# EAGLE board minimum system (EAGLE 7.6.0)
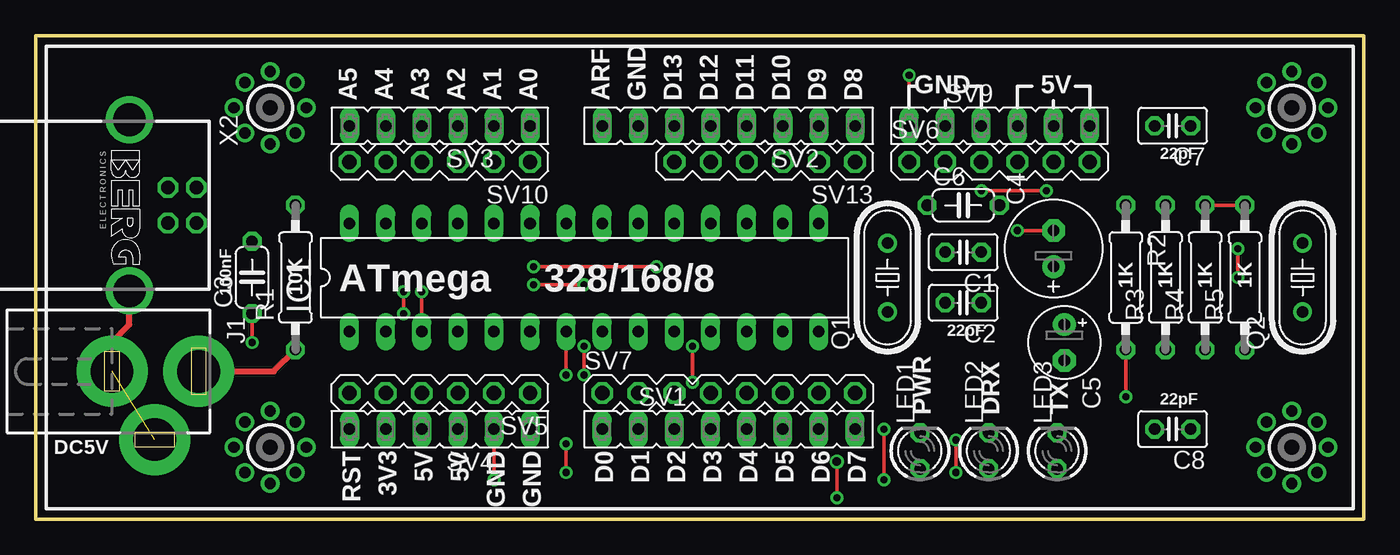
[diagram p0: board, top side]
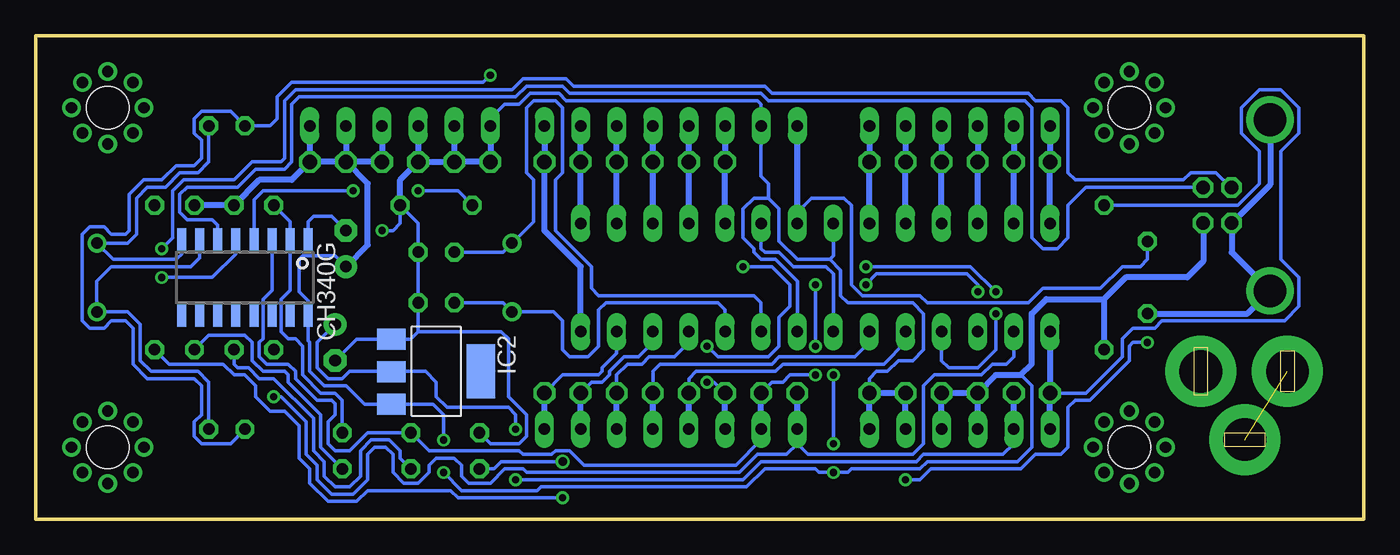
[diagram p1: board, bottom side, seen from below]

Size 93.47 x 34.04 mm. Coordinates in mm from the lower left corner, seen from the top.
Outline: 0,34.04 93.47,34.04 93.47,0 0,0 0,34.04
Copper layers (1*16): Top 0.035mm / dielectric 1.5mm / Bottom 0.035mm
Design rules "default": minimum track width 10mil, minimum drill 24mil, track to track 8mil, track to pad 8mil, pad to pad 8mil, via to via 8mil, smd to smd 8mil, copper to edge 40mil, drill to drill 8mil, minimum pad ring 10mil, minimum via ring 8mil, stop-mask expansion 4mil, vias tented up to drill 0mil, thermal gap 10mil

## Footprints (pad centres in the part's own frame; a part is rotated, then mirrored left to right if it is on the bottom)
C025-025X050 = drill 0.813 octagon: 1 -1.27,0; 2 1.27,0
C050-024X044 = drill 0.813 octagon: 1 -2.54,0; 2 2.54,0
E2,5-7 = drill 0.813 pad 1.6: + -1.27,0 | drill 0.813 pad 1.6 octagon: - 1.27,0
E2,5-5 = drill 0.813 pad 1.6: + -1.27,0 | drill 0.813 pad 1.6 octagon: - 1.27,0
3,0 = drill 0.8: P$1 -2.54,0; P$2 2.54,0; P$3 0,2.54; P$4 0,-2.54; P$5 1.778,1.778; P$6 1.778,-1.778; P$7 -1.778,1.778; P$8 -1.778,-1.778 | hole 3: 0,0
DIL28-3 = drill 0.813 long: 1 -16.51,-3.81; 2 -13.97,-3.81; 3 -11.43,-3.81; 4 -8.89,-3.81; 5 -6.35,-3.81; 6 -3.81,-3.81; 7 -1.27,-3.81; 8 1.27,-3.81; 9 3.81,-3.81; 10 6.35,-3.81; 11 8.89,-3.81; 12 11.43,-3.81; 13 13.97,-3.81; 14 16.51,-3.81; 15 16.51,3.81; 16 13.97,3.81; 17 11.43,3.81; 18 8.89,3.81; 19 6.35,3.81; 20 3.81,3.81; 21 1.27,3.81; 22 -1.27,3.81; 23 -3.81,3.81; 24 -6.35,3.81; 25 -8.89,3.81; 26 -11.43,3.81; 27 -13.97,3.81; 28 -16.51,3.81
SOT223 = smd 1.499 x 2.007: 1 -2.261,-3.15; 2 0.025,-3.15; 3 2.311,-3.15 | smd 3.81 x 2.007: 4 0,3.15
DCJ0202 = drill 3 pad 5: 1 0,3.1; 2 4.8,0; 3 0,-3
LED3MM = drill 0.813 octagon: A -1.27,0; K 1.27,0
HC49/S = drill 0.813: 1 -2.413,0; 2 2.413,0
0207/10 = drill 0.813 octagon: 1 -5.08,0; 2 5.08,0
FE08 = drill 0.813 long: 1 -8.89,0; 2 -6.35,0; 3 -3.81,0; 4 -1.27,0; 5 1.27,0; 6 3.81,0; 7 6.35,0; 8 8.89,0
FE06 = drill 0.813 long: 1 -6.35,0; 2 -3.81,0; 3 -1.27,0; 4 1.27,0; 5 3.81,0; 6 6.35,0
MA06-1 = drill 1.016 octagon: 1 -6.35,0; 2 -3.81,0; 3 -1.27,0; 4 1.27,0; 5 3.81,0; 6 6.35,0
MA08-1 = drill 1.016 octagon: 1 -8.89,0; 2 -6.35,0; 3 -3.81,0; 4 -1.27,0; 5 1.27,0; 6 3.81,0; 7 6.35,0; 8 8.89,0
SOIC16 = smd 0.635 x 1.524: 1 -4.445,-2.695; 2 -3.175,-2.695; 3 -1.905,-2.695; 4 -0.635,-2.695; 5 0.635,-2.695; 6 1.905,-2.695; 7 3.175,-2.695; 8 4.445,-2.695; 9 4.445,2.695; 10 3.175,2.695; 11 1.905,2.695; 12 0.635,2.695; 13 -0.635,2.695; 14 -1.905,2.695; 15 -3.175,2.695; 16 -4.445,2.695
PN61729-S = drill 0.95 octagon: 1 1.25,4.71; 2 -1.25,4.71; 3 -1.25,2.71; 4 1.25,2.71 | drill 2.3 pad 2.9: S1 -6.02,0; S2 6.02,0

## Placement (x,y rotation side)
C1  [C025-025X050]  65.28,18.8 180 top
C2  [C025-025X050]  65.28,15.24 180 top
C3  [C050-024X044]  15.24,17.02 90 top
C4  [E2,5-7]  71.63,19.05 90 top
C5  [E2,5-5]  72.39,12.45 270 top
C6  [C050-024X044]  65.28,22.1 0 top
C7  [C025-025X050]  80.01,27.69 180 top
C8  [C025-025X050]  80.01,6.35 180 top
H1  MOUNT-HOLE3.0  [3,0]  16.51,28.96 0 top
H2  MOUNT-HOLE3.0  [3,0]  16.51,5.08 0 top
H3  MOUNT-HOLE3.0  [3,0]  88.39,28.96 0 top
H4  MOUNT-HOLE3.0  [3,0]  88.39,5.08 0 top
IC1  MEGA8-P  [DIL28-3]  38.61,17.02 0 top
IC2  REG1117  [SOT223]  65.28,10.41 270 bottom
J1  DCJ0202  [DCJ0202]  8.38,10.41 270 top
LED1  [LED3MM]  62.23,4.83 90 top
LED2  [LED3MM]  67.06,4.83 90 top
LED3  [LED3MM]  71.88,4.83 90 top
Q1  [HC49/S]  59.94,17.02 90 top
Q2  [HC49/S]  89.15,17.02 90 top
R1  10k  [0207/10]  18.29,17.02 90 top
R2  1k  [0207/10]  76.71,17.02 270 top
R3  1k  [0207/10]  79.5,17.02 90 top
R4  1k  [0207/10]  82.3,17.02 90 top
R5  1k  [0207/10]  85.09,17.02 90 top
SV1  [FE08]  48.77,6.35 0 top
SV2  [FE08]  48.77,27.69 180 top
SV3  [FE06]  28.45,27.69 180 top
SV4  [FE06]  28.45,6.35 180 top
SV5  [MA06-1]  28.45,8.89 180 top
SV6  [MA06-1]  67.82,25.15 0 top
SV7  [MA08-1]  48.77,8.89 0 top
SV9  [FE06]  67.82,27.69 0 top
SV10  [MA06-1]  28.45,25.15 180 top
SV13  [MA06-1]  51.31,25.15 180 top
U$1  CH340G  [SOIC16]  78.74,17.02 180 bottom
X2  PN61729-S  [PN61729-S]  6.6,22.1 270 top

## Library data of the parts
C1-C8 = rcl
H1-H4 = holes
IC1 = atmel; OC_FARNELL: unknown; OC_NEWARK: unknown
IC2 = burr-brown; MPN: REG1117; OC_FARNELL: 1097566; OC_NEWARK: 14P6981
J1 = con-jack; OC_FARNELL: unknown; OC_NEWARK: unknown
LED1-LED3 = led
Q1 Q2 = crystal; OC_FARNELL: 1667008; OC_NEWARK: unknown
R1-R5 = resistor
SV1-SV4 SV9 = con-lsta; OC_FARNELL: unknown; OC_NEWARK: unknown
SV5-SV7 SV10 SV13 = con-lstb; OC_FARNELL: unknown; OC_NEWARK: unknown
U$1 = ch340g
X2 = con-berg; OC_FARNELL: unknown; OC_NEWARK: unknown

## Nets
2: IC1.4 SV1.3 SV7.3
3: IC1.5 SV1.4 SV7.4
3V3: C5.+ IC2.2 SV4.5 SV5.5
4: IC1.6 SV1.5 SV7.5
5: IC1.11 SV1.6 SV7.6
6: IC1.12 SV1.7 SV7.7
7: IC1.13 SV1.8 SV7.8
8: IC1.14 SV2.1 SV13.1
9: IC1.15 SV2.2 SV13.2
10: IC1.16 SV2.3 SV13.3
11: IC1.17 SV2.4 SV13.4
12: IC1.18 SV2.5 SV13.5
13: IC1.19 SV2.6 SV13.6
A0: IC1.23 SV3.1 SV10.1
A1: IC1.24 SV3.2 SV10.2
A2: IC1.25 SV3.3 SV10.3
A3: IC1.26 SV3.4 SV10.4
A4: IC1.27 SV3.5 SV10.5
A5: IC1.28 SV3.6 SV10.6
AREF: C3.2 IC1.21 SV2.8
D0: IC1.2 R2.2 SV1.1 SV7.1
D1: IC1.3 LED2.K SV1.2 SV7.2 U$1.3
GND: C1.1 C2.1 C3.1 C4.- C5.- C6.2 C7.2 C8.2 IC1.8 IC1.22 IC2.1 J1.2 J1.3 LED1.K SV2.7 SV4.1 SV4.2 SV5.1 SV5.2 SV6.1 SV6.2 SV6.3 SV9.1 SV9.2 SV9.3 U$1.1 X2.4 X2.S1 X2.S2
N$2: U$1.6 X2.2
N$3: U$1.5 X2.3
N$4: C1.2 IC1.9 Q1.2
N$5: C2.2 IC1.10 Q1.1
N$6: C6.1 U$1.4
N$7: LED2.A R3.1
N$8: LED3.A R4.1
N$9: LED1.A R5.1
N$10: C7.1 Q2.2 U$1.8
N$11: C8.1 Q2.1 U$1.7
RESET: IC1.1 R1.2 SV4.6 SV5.6
TX: LED3.K R2.1 U$1.2
VCC: C4.+ IC1.7 IC1.20 IC2.3 J1.1 R1.1 R3.2 R4.2 R5.2 SV4.3 SV4.4 SV5.3 SV5.4 SV6.4 SV6.5 SV6.6 SV9.4 SV9.5 SV9.6 U$1.16 X2.1

## Tracks (layer width: path | path; a pad name or v marks a point on that pad's centre or on a via)
2  (via drill 0.5)
  Top 0.254: v25.91,14.48 v25.91,16 | v35.05,17.78 v43.69,17.78 | v46.23,12.19 v46.23,9.65
  Bottom 0.254: IC1.4 29.72,11.18 29.21,10.67 27.18,10.67 25.91,11.94 v25.91,14.48 | v25.91,16 27.69,17.78 v35.05,17.78 | v46.23,12.19 45.47,11.43 41.91,11.43 41.15,12.19 41.15,14.22 40.39,14.99 40.39,16.51 41.66,17.78 v43.69,17.78 | v46.23,9.65 45.72,9.65 SV7.3
  Bottom 0.406: SV1.3 SV7.3
3
  Bottom 0.254: IC1.5 32.26,12.45 33.78,10.92 40.89,10.92 41.4,10.41 46.99,10.41 47.5,9.91 SV7.4
  Bottom 0.406: SV1.4 SV7.4
3V3  (via drill 0.5)
  Top 0.254: v59.69,2.79 v59.69,6.35
  Bottom 0.254: C5.+ 73.66,12.45 73.66,10.67 72.9,9.91 71.88,9.91 71.37,10.41 68.45,10.41 IC2.2 68.4,10.41 66.04,10.41 65.28,9.65 65.28,8.64 64.52,7.87 60.2,7.87 59.69,7.37 v59.69,6.35 | SV5.5 24.64,5.33 25.4,4.57 30.99,4.57 31.5,4.06 42.42,4.06 43.69,2.79 v59.69,2.79
  Bottom 0.406: SV4.5 SV5.5
4
  Bottom 0.254: SV7.5 50.04,10.41 49.53,10.92 41.66,10.92 41.15,11.43 35.81,11.43 34.8,12.45 IC1.6
  Bottom 0.406: SV1.5 SV7.5
5
  Bottom 0.254: IC1.11 47.5,12.45 48.51,11.43 50.29,11.43 50.8,10.92 51.82,10.92 52.58,10.16 SV7.6
  Bottom 0.406: SV1.6 SV7.6
6
  Bottom 0.254: IC1.12 50.04,12.45 51.05,11.43 52.07,11.43 53.09,10.41 53.09,10.16 53.59,9.65 54.36,9.65 SV7.7
  Bottom 0.406: SV1.7 SV7.7
7
  Bottom 0.254: IC1.13 52.58,11.68 53.59,10.67 53.59,10.41 53.85,10.16 56.39,10.16 SV7.8
  Bottom 0.406: SV1.8 SV7.8
8
  Bottom 0.406: IC1.14 55.12,17.78 57.66,20.32 SV13.1 SV2.1
9
  Bottom 0.406: IC1.15 SV13.2 SV2.2
10
  Bottom 0.406: IC1.16 SV13.3 SV2.3
11
  Bottom 0.406: IC1.17 SV13.4 SV2.4
12
  Bottom 0.406: IC1.18 SV13.5 SV2.5
13
  Bottom 0.406: IC1.19 SV13.6 SV2.6
A0
  Bottom 0.406: IC1.23 SV10.1 SV3.1
A1
  Bottom 0.406: IC1.24 SV10.2 SV3.2
A2
  Bottom 0.406: IC1.25 SV10.3 SV3.3
A3
  Bottom 0.406: IC1.26 SV10.4 SV3.4
A4
  Bottom 0.406: IC1.27 24.64,24.64 SV10.5 SV3.5
A5
  Bottom 0.406: IC1.28 SV10.6 SV3.6
AREF
  Bottom 0.254: C3.2 15.24,18.29 15.75,17.78 17.02,17.78 18.54,16.26 22.61,16.26 23.62,15.24 30.73,15.24 31.24,15.75 35.31,15.75 36.07,16.51 36.07,22.1 36.58,22.61 38.86,22.61 39.88,21.59
  Bottom 0.406: IC1.21 39.88,21.59 SV2.8
D0  (via drill 0.5)
  Top 0.254: v76.71,8.64 R2.2
  Bottom 0.254: IC1.2 24.64,11.43 25.15,10.92 26.16,10.92 26.92,10.16 30.23,10.16 30.99,9.4 30.99,5.33 31.75,4.57 39.12,4.57 39.88,5.33 | 39.88,5.33 SV1.1 | 39.88,5.33 40.64,4.57 42.67,4.57 43.94,3.3 58.93,3.3 59.18,3.56 60.45,3.56 61.47,2.54 62.99,2.54 63.5,3.05 63.5,3.81 64.01,4.32 65.28,4.32 65.79,3.81 65.79,3.3 66.55,2.54 67.56,2.54 68.33,3.3 68.33,4.57 68.83,5.08 69.6,5.08 70.1,4.57 70.1,2.79 71.12,1.78 72.64,1.78 73.66,2.79 73.66,3.81 74.42,4.57 74.42,6.86 76.2,8.64 v76.71,8.64
  Bottom 0.406: SV1.1 SV7.1
D1  (via drill 0.5)
  Top 0.254: IC1.3 v27.18,16 | v35.05,16.51 v38.61,16.51 | v38.61,12.19 v38.61,10.16
  Bottom 0.254: U$1.3 76.83,16.13 77.47,15.49 77.47,12.7 77.72,12.45 77.72,11.43 77.22,10.92 75.69,10.92 75.18,10.41 75.18,9.91 73.66,8.38 72.64,8.38 72.39,8.13 72.39,7.37 72.9,6.86 72.9,5.33 72.39,4.83 71.37,4.83 70.1,6.1 LED2.K 65.79,4.83 59.44,4.83 59.18,4.57 57.15,4.57 56.9,4.83 55.88,4.83 54.86,3.81 44.2,3.81 42.42,5.59 SV1.2 | v27.18,16 27.18,16.51 27.94,17.27 34.29,17.27 v35.05,16.51 | v38.61,16.51 v38.61,12.19 | v38.61,10.16 40.39,10.16 40.89,9.65 41.66,9.65 SV7.2
  Bottom 0.406: SV1.2 SV7.2
GND  (via drill 0.5)  (1 unrouted)
  Top 0.254: v69.09,20.32 C4.- | C3.1 v15.24,12.45 | v32.26,2.79 SV4.2 | v61.47,31.24 SV9.1
  Top 0.406: J1.3 5.38,12.49 6.6,13.72 X2.S2
  Bottom 0.254: IC1.8 39.88,16.76 41.4,18.29 42.42,18.29 42.93,18.8 42.93,19.05 43.69,19.81 43.69,21.84 42.93,22.61 41.91,22.61 | 41.91,22.61 41.15,21.84 41.15,19.56 39.88,18.29 37.59,18.29 | SV5.1 34.8,9.91 34.29,10.41 33.53,10.41 32.77,11.18 31.75,11.18 30.99,11.94 30.99,14.48 31.75,15.24 36.32,15.24 36.83,15.75 36.83,17.53 37.59,18.29 | U$1.1 74.29,20.96 73.91,21.34 72.64,21.34 C4.- | 66.55,13.21 67.08,12.68 IC2.1 70.89,12.68 C5.- | 66.55,13.21 C2.1 C1.1 66.55,20.83 C6.2 67.82,20.83 68.33,20.32 v69.09,20.32 | IC1.22 37.34,18.54 37.59,18.29 | 41.91,22.61 41.91,23.62 42.42,24.13 SV2.7 42.42,29.21 42.67,29.46 56.13,29.46 56.64,29.97 58.67,29.97 59.44,29.21 60.45,29.21 61.47,28.19 SV6.1 | v15.24,12.45 16.26,12.45 16.51,12.19 16.51,11.18 19.3,8.38 20.32,8.38 20.83,7.87 20.83,5.08 21.34,4.57 23.11,4.57 24.13,3.56 30.48,3.56 31.24,2.79 v32.26,2.79 | LED1.K 61.47,5.33 59.44,5.33 58.93,5.84 58.93,7.37 60.2,8.64 60.2,12.7 60.71,13.21 66.55,13.21 | v61.47,31.24 61.98,30.73 75.44,30.73 76.45,29.72 76.45,28.19 76.96,27.69 C7.2 79.76,28.7 81.79,28.7 82.3,28.19 82.3,27.18 81.79,26.67 81.79,25.4 82.3,24.89 83.57,24.89 84.58,23.88 85.85,23.88 86.87,22.86 86.87,20.32 87.12,20.07 88.14,20.07 88.65,20.57 89.66,20.57 90.17,20.07 90.17,13.97 89.66,13.46 88.65,13.46 88.14,13.97 87.12,13.97 86.61,13.46 86.61,10.92 85.6,9.91 82.3,9.91 81.79,9.4 81.79,7.37 82.3,6.86 82.3,5.84 81.79,5.33 79.76,5.33 C8.2
  Bottom 0.406: SV4.2 SV5.2 SV5.1 SV4.1 | SV9.1 SV6.1 SV6.2 | SV9.2 SV6.2 | SV9.3 SV6.3 | SV6.3 SV6.2 | C6.2 67.82,23.88 SV6.3 | X2.S1 6.6,23.56 X2.4 9.31,18.79 X2.S2 8.2,14.48 C3.1
N$2
  Bottom 0.254: X2.2 19.58,23.35 20.83,22.1 20.83,19.81 21.59,19.05 22.61,19.05 23.37,19.81 23.37,28.96 23.88,29.46 41.91,29.46 42.42,29.97 55.88,29.97 56.39,30.48 58.93,30.48 59.69,29.72 74.93,29.72 75.44,29.21 75.44,25.15 75.95,24.64 77.98,24.64 79.25,23.37 82.8,23.37 83.31,22.86 83.31,21.59 82.8,21.08 81.03,21.08 80.64,20.7 U$1.6
N$3  (via drill 0.5)
  Top 0.254: v84.58,19.05 v84.58,17.02
  Bottom 0.254: X2.3 9.38,23.35 10.41,24.38 12.19,24.38 12.7,23.88 20.32,23.88 20.83,24.38 20.83,28.96 21.34,29.46 23.11,29.46 23.62,29.97 41.66,29.97 42.16,30.48 55.63,30.48 56.13,30.99 59.18,30.99 59.94,30.23 75.18,30.23 75.95,29.46 75.95,25.4 76.2,25.15 78.23,25.15 79.5,23.88 83.06,23.88 83.82,23.11 83.82,19.81 v84.58,19.05 | U$1.5 79.38,18.67 81.03,17.02 v84.58,17.02
N$4
  Bottom 0.254: IC1.9 42.42,15.24 42.93,15.75 53.85,15.75 54.36,16.26 54.36,17.78 56.9,20.32 56.9,23.88 56.39,24.38 56.39,28.96 56.9,29.46 58.42,29.46 58.93,28.96 58.93,24.38 58.42,23.88 58.42,20.96 59.5,19.88 Q1.2 60.58,18.8 C1.2
N$5
  Bottom 0.254: IC1.10 44.96,14.73 45.47,15.24 53.34,15.24 53.85,14.73 53.85,12.19 54.61,11.43 55.88,11.43 56.39,11.94 56.39,13.97 57.02,14.61 Q1.1 60.58,15.24 C2.2
N$6  (via drill 0.5)
  Top 0.254: v71.12,23.11 v66.55,23.11
  Bottom 0.254: U$1.4 78.1,22.48 77.47,23.11 v71.12,23.11 | v66.55,23.11 63.75,23.11 C6.1
N$7
  Bottom 0.254: R3.1 79.5,10.92 79.25,10.67 78.49,10.67 77.72,9.91 76.71,9.91 73.91,7.11 73.91,4.83 73.15,4.06 73.15,3.05 72.39,2.29 71.37,2.29 70.61,3.05 70.61,4.83 69.85,5.59 68.58,5.59 67.82,4.83 67.82,4.32 LED2.A
N$8
  Bottom 0.254: LED3.A 73.41,5.08 73.41,7.37 75.69,9.65 75.69,10.16 75.95,10.41 77.47,10.41 78.23,11.18 78.23,12.45 78.74,12.95 81.28,12.95 R4.1
N$9  (via drill 0.5, 0.6)
  Top 0.254: v56.39,4.06 v56.39,1.52
  Bottom 0.254: R5.1 84.07,10.92 80.26,10.92 79.5,10.16 78.74,10.16 77.98,9.4 77.98,8.64 76.96,7.62 75.95,7.62 74.93,6.6 74.93,4.32 74.17,3.56 74.17,2.54 72.9,1.27 70.87,1.27 70.1,2.03 64.26,2.03 63.75,1.52 v56.39,1.52 | LED1.A 61.21,3.56 60.71,4.06 v56.39,4.06
N$10
  Bottom 0.254: U$1.8 83.18,18.67 83.57,18.29 88.01,18.29 Q2.2 86.99,19.43 86.36,20.07 86.36,22.61 85.6,23.37 84.33,23.37 83.31,24.38 82.04,24.38 81.28,25.15 C7.1
N$11
  Bottom 0.254: U$1.7 81.91,18.41 82.55,17.78 88.14,17.78 89.15,16.76 Q2.1 86.99,14.61 86.11,13.72 86.11,11.18 85.34,10.41 82.04,10.41 81.28,9.65 C8.1
RESET
  Bottom 0.254: SV5.6 19.56,8.89 17.02,11.43 17.02,12.7 16.26,13.46 14.73,13.46 14.22,13.97 5.59,13.97 4.57,14.99 4.57,17.02 5.84,18.29 5.84,25.91 4.57,27.18 4.57,28.96 5.84,30.23 7.37,30.23 8.64,28.96 8.64,27.18 7.37,25.91 7.37,23.62 8.89,22.1 R1.2
  Bottom 0.406: SV4.6 SV5.6 IC1.1
TX
  Bottom 0.254: R2.1 75.56,20.96 U$1.2 75.56,16.13 76.2,15.49 76.2,13.21 75.69,12.7 75.18,12.7 74.68,12.19 74.68,10.16 73.41,8.89 72.39,8.89 71.88,8.38 LED3.K
VCC  (via drill 0.5)
  Top 0.254: IC1.7 v37.34,10.16 | v37.34,5.33 v37.34,3.3 | v64.77,5.59 v64.77,3.3 | R4.2 R5.2
  Top 0.406: J1.1 16.76,10.41 R1.1
  Bottom 0.254: IC1.7 37.34,17.27 37.85,17.78 40.13,17.78 41.15,18.8 42.16,18.8 42.42,19.05 IC1.20 | v37.34,10.16 v37.34,5.33 | 24.13,10.16 23.37,9.4 23.37,5.08 24.38,4.06 30.73,4.06 31.24,3.56 36.07,3.56 36.32,3.3 v37.34,3.3 38.35,3.3 38.61,3.56 42.16,3.56 43.43,2.29 57.91,2.29 58.17,2.03 63.5,2.03 v64.77,3.3 | v64.77,5.59 64.77,7.37 65.51,8.1 IC2.3 70.33,8.1 71.63,9.4 73.15,9.4 74.17,10.41 74.17,12.45 74.29,12.57 U$1.16 74.29,15.37 74.93,16 74.93,18.29 74.68,18.54 72.39,18.54 C4.+
  Bottom 0.406: SV4.3 SV5.3 SV5.4 | SV4.4 SV5.4 | SV9.4 SV6.4 SV6.5 | SV9.5 SV6.5 | SV9.6 SV6.6 | SV6.5 SV6.6 | SV6.6 75.44,23.88 77.72,23.88 R3.2 R4.2 | C4.+ 70.1,19.3 70.1,23.62 SV6.5 | X2.1 11.31,18.15 12.45,17.02 16.76,17.02 18.29,15.49 | 18.29,15.49 R1.1 | SV5.4 25.91,10.16 24.13,10.16 23.37,10.92 23.37,14.48 22.35,15.49 18.29,15.49

## Text on the board
tPlace: GND | 5V | A5 | A4 | A3 | A2 | A1 | A0 | ARF | GND | D13 | D12 | D11 | D10 | D9 | D8 | 22pF | 100nF | 1K | 1K | 1K | 1K | 10K | ATmega 328/168/8 | 22pF | 22pF | PWR | DRX | TX | DC5V | RST | 3V3 | 5V | 5V | GND | GND | D0 | D1 | D2 | D3 | D4 | D5 | D6 | D7